# EAGLE board Main Board (EAGLE 9.6.2)
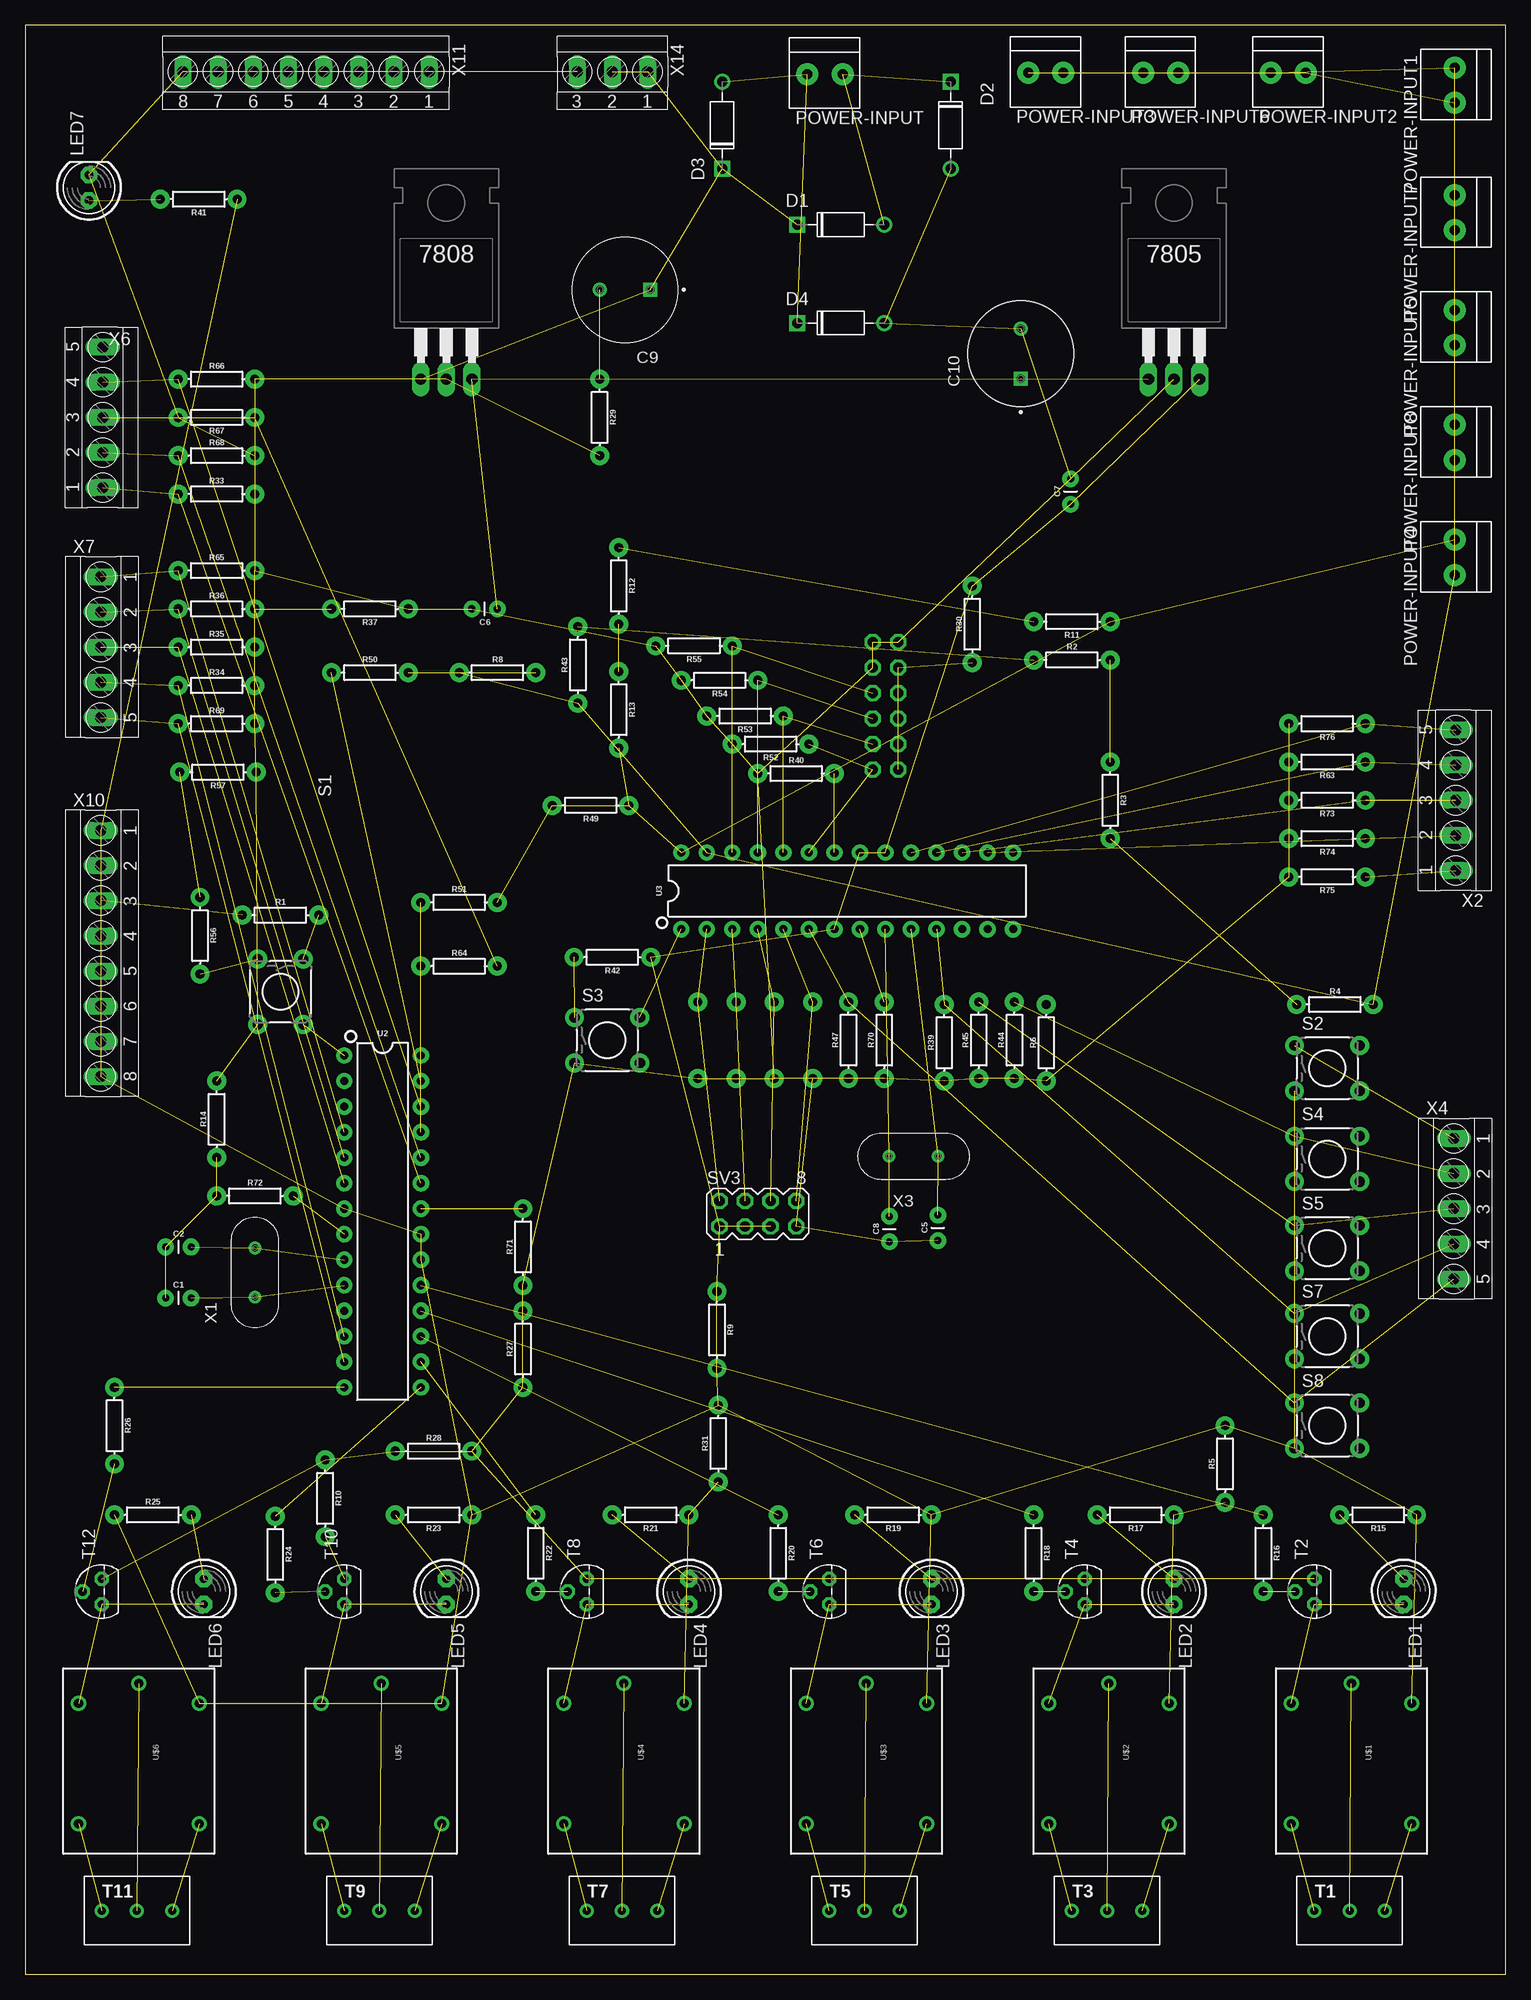
[diagram p0: board, top side]
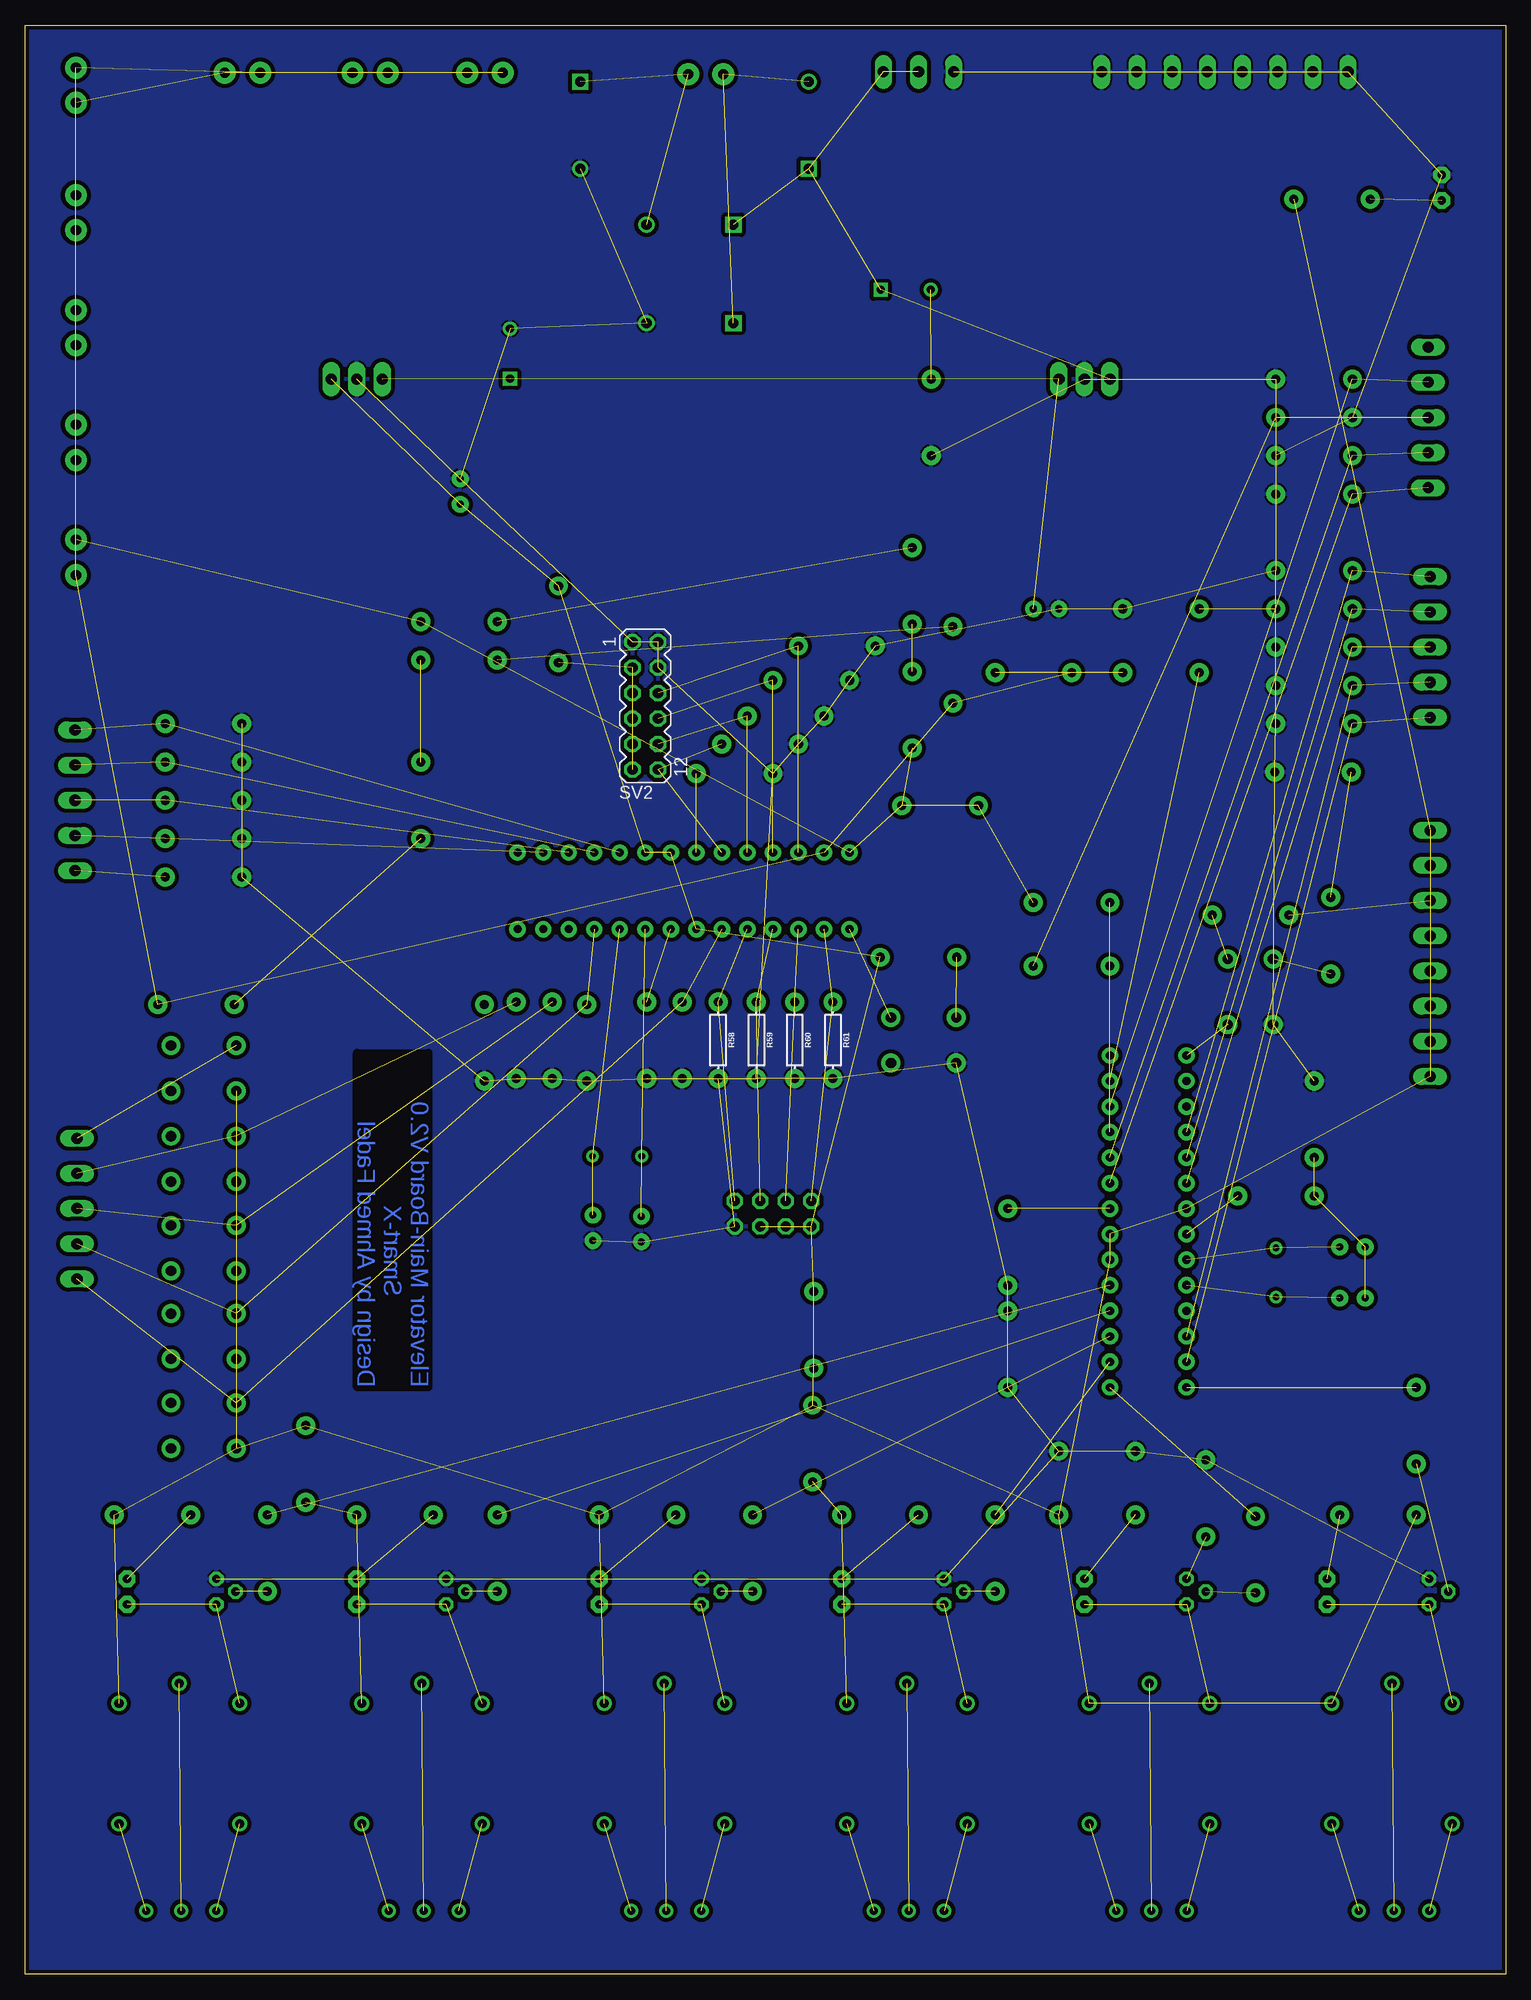
[diagram p1: board, bottom side, seen from below]

Size 147.3 x 193.98 mm. Coordinates in mm from the lower left corner, seen from the top.
Outline: 0,0 147.3,0 147.3,193.98 0,193.98 0,0
Copper layers 16: Bottom 0.105mm
Design rules "eC_1Layer_PClass3_BaseCopperO105 *": minimum track width 0.4mm, minimum drill 0.5mm, track to track 0.4mm, track to pad 0.4mm, pad to pad 0.4mm, via to via 0.4mm, smd to smd 0mil, copper to edge 0.4mm, drill to drill 0.35mm, minimum pad ring 0.3mm, minimum via ring 0.3mm, stop-mask expansion 0mil, vias tented up to drill 0.45mm, thermal gap 0.2mm

## Footprints (pad centres in the part's own frame; a part is rotated, then mirrored left to right if it is on the bottom)
TO220BH-NH = drill 1.118 long: 1 -2.54,-6.35; 2 0,-6.35; 3 2.54,-6.35
CAP-PTH-2.54 = drill 0.7 pad 1.651: 1 -1.27,0; 2 1.27,0
CAP_RADIAL_5MM = drill 0.8 pad 1.2 square: 1 -2.5,0 | drill 0.8 pad 1.2: 2 2.5,0
DO-41 = drill 1: A 4.325,0 | drill 1 square: C -4.325,0
LED5MM = drill 0.813 pad 1.676 octagon: A -1.27,0; K 1.27,0
1X2-3.5MM = drill 1 pad 2.184: 1 1.8,0; 2 -1.7,0
AXIAL-0.3 = drill 0.9 pad 1.88: P$1 -3.81,0; P$2 3.81,0
TACTILE-PTH = drill 1.016 pad 1.88: 1 -3.251,2.261; 2 3.251,2.261; 3 -3.251,-2.261; 4 3.251,-2.261
MA06-2 = drill 1.016 octagon: 1 -6.35,-1.27; 2 -6.35,1.27; 3 -3.81,-1.27; 4 -3.81,1.27; 5 -1.27,-1.27; 6 -1.27,1.27; 7 1.27,-1.27; 8 1.27,1.27; 9 3.81,-1.27; 10 3.81,1.27; 11 6.35,-1.27; 12 6.35,1.27
MA04-2 = drill 1.016 octagon: 1 -3.81,-1.27; 2 -3.81,1.27; 3 -1.27,-1.27; 4 -1.27,1.27; 5 1.27,-1.27; 6 1.27,1.27; 7 3.81,-1.27; 8 3.81,1.27
ED350V-03P = drill 0.8: P$1 0,0; P$2 3.5,0; P$3 7,0
TO92 = drill 0.813 octagon: 1 1.27,0; 2 0,1.905; 3 -1.27,0
DIP28 = drill 0.813 pad 1.626: 1 -16.51,-3.81; 2 -13.97,-3.81; 3 -11.43,-3.81; 4 -8.89,-3.81; 5 -6.35,-3.81; 6 -3.81,-3.81; 7 -1.27,-3.81; 8 1.27,-3.81; 9 3.81,-3.81; 10 6.35,-3.81; 11 8.89,-3.81; 12 11.43,-3.81; 13 13.97,-3.81; 14 16.51,-3.81; 15 16.51,3.81; 16 13.97,3.81; 17 11.43,3.81; 18 8.89,3.81; 19 6.35,3.81; 20 3.81,3.81; 21 1.27,3.81; 22 -1.27,3.81; 23 -3.81,3.81; 24 -6.35,3.81; 25 -8.89,3.81; 26 -11.43,3.81; 27 -13.97,3.81; 28 -16.51,3.81
SRD-05VDC-SL-C = drill 0.9: COIL0 -5.39,-6.12; COIL1 -5.39,5.88; SWCLOSED 6.61,-6.12; SWCOMMON -7.39,-0.12; SWOPEN 6.61,5.88
XTAL_HC49 = drill 0.65 pad 1.05: 1 -2.44,0; 2 2.44,0
TERMINAL-BLOCK-5-PIN-3.5MM-LONG-PAD = drill 1.1 pad 1.7 long: 1 -7,-0.1; 2 -3.5,-0.1; 3 0,-0.1; 4 3.5,-0.1; 5 7,-0.1
TERMINAL-BLOCK-8-PIN-3.5MM-LONG-PAD = drill 1.1 pad 1.7 long: 1 -12.25,-0.1; 2 -8.75,-0.1; 3 -5.25,-0.1; 4 -1.75,-0.1; 5 1.75,-0.1; 6 5.25,-0.1; 7 8.75,-0.1; 8 12.25,-0.1
TERMINAL-BLOCK-3-PIN-3.5MM-LONG-PAD = drill 1.1 pad 1.7 long: 1 -3.5,-0.1; 2 0,-0.1; 3 3.5,-0.1

## Placement (x,y rotation side)
7805  [TO220BH-NH]  114.3,165.1 0 top
7808  [TO220BH-NH]  41.91,165.1 0 top
C1  22pF  [CAP-PTH-2.54]  15.24,67.31 0 top
C2  22pF  [CAP-PTH-2.54]  15.24,72.39 0 top
C5  22pF  [CAP-PTH-2.54]  90.8,74.3 90 top
C6  104pF  [CAP-PTH-2.54]  45.72,135.89 180 top
C7  104pF  [CAP-PTH-2.54]  104.01,147.57 90 top
C8  22pF  [CAP-PTH-2.54]  85.98,74.17 90 top
C9  470 uF  [CAP_RADIAL_5MM]  59.69,167.64 180 top
C10  470 uF  [CAP_RADIAL_5MM]  99.06,161.29 90 top
D1  1N4001  [DO-41]  81.15,174.12 0 top
D2  1N4001  [DO-41]  92.08,184.02 270 top
D3  1N4001  [DO-41]  69.34,184.02 90 top
D4  1N4001  [DO-41]  81.15,164.34 0 top
LED1  [LED5MM]  137.16,38.1 270 top
LED2  [LED5MM]  114.3,38.1 270 top
LED3  [LED5MM]  90.17,38.1 270 top
LED4  [LED5MM]  66.04,38.1 270 top
LED5  [LED5MM]  41.91,38.1 270 top
LED6  [LED5MM]  17.78,38.1 270 top
LED7  [LED5MM]  6.35,177.8 90 top
POWER-INPUT  1X2-3.5MM  [1X2-3.5MM]  79.63,189.1 180 top
POWER-INPUT1  1X2-3.5MM  [1X2-3.5MM]  142.24,187.96 90 top
POWER-INPUT2  1X2-3.5MM  [1X2-3.5MM]  125.73,189.23 180 top
POWER-INPUT3  1X2-3.5MM  [1X2-3.5MM]  101.6,189.23 180 top
POWER-INPUT4  1X2-3.5MM  [1X2-3.5MM]  142.24,140.97 90 top
POWER-INPUT5  1X2-3.5MM  [1X2-3.5MM]  142.24,163.83 90 top
POWER-INPUT6  1X2-3.5MM  [1X2-3.5MM]  113.03,189.23 180 top
POWER-INPUT7  1X2-3.5MM  [1X2-3.5MM]  142.24,175.26 90 top
POWER-INPUT8  1X2-3.5MM  [1X2-3.5MM]  142.24,152.4 90 top
R1  10K  [AXIAL-0.3]  25.4,105.41 0 top
R2  0  [AXIAL-0.3]  104.14,130.81 0 top
R3  0  [AXIAL-0.3]  107.95,116.84 270 top
R4  0  [AXIAL-0.3]  130.3,96.52 0 top
R5  0  [AXIAL-0.3]  119.38,50.8 90 top
R6  10K  [AXIAL-0.3]  101.6,92.71 90 top
R8  0  [AXIAL-0.3]  46.99,129.54 0 top
R9  0  [AXIAL-0.3]  68.83,64.13 270 top
R10  0  [AXIAL-0.3]  29.84,47.37 270 top
R11  0  [AXIAL-0.3]  104.14,134.62 180 top
R12  0  [AXIAL-0.3]  59.05,138.18 270 top
R13  0  [AXIAL-0.3]  59.05,125.86 270 top
R14  0  [AXIAL-0.3]  19.05,85.09 90 top
R15  330  [AXIAL-0.3]  134.62,45.72 180 top
R16  1K  [AXIAL-0.3]  123.19,41.91 270 top
R17  330  [AXIAL-0.3]  110.49,45.72 180 top
R18  1K  [AXIAL-0.3]  100.33,41.91 270 top
R19  330  [AXIAL-0.3]  86.36,45.72 180 top
R20  1K  [AXIAL-0.3]  74.93,41.91 270 top
R21  330  [AXIAL-0.3]  62.23,45.72 180 top
R22  1K  [AXIAL-0.3]  50.8,41.91 270 top
R23  330  [AXIAL-0.3]  40.64,45.72 180 top
R24  1K  [AXIAL-0.3]  24.89,41.78 270 top
R25  330  [AXIAL-0.3]  12.7,45.72 0 top
R26  1K  [AXIAL-0.3]  8.89,54.61 270 top
R27  0  [AXIAL-0.3]  49.53,62.23 90 top
R28  0  [AXIAL-0.3]  40.64,52.07 0 top
R29  0  [AXIAL-0.3]  57.15,154.94 270 top
R30  0  [AXIAL-0.3]  94.23,134.37 90 top
R31  0  [AXIAL-0.3]  68.96,52.83 90 top
R33  10K  [AXIAL-0.3]  19.05,147.32 0 top
R34  10K  [AXIAL-0.3]  19.05,128.27 0 top
R35  10K  [AXIAL-0.3]  19.05,132.08 0 top
R36  10K  [AXIAL-0.3]  19.05,135.89 0 top
R37  0  [AXIAL-0.3]  34.29,135.89 180 top
R39  10K  [AXIAL-0.3]  91.44,92.71 90 top
R40  0  [AXIAL-0.3]  76.71,119.51 0 top
R41  330  [AXIAL-0.3]  17.27,176.66 180 top
R42  10K  [AXIAL-0.3]  58.42,101.22 180 top
R43  0  [AXIAL-0.3]  54.99,130.3 90 top
R44  10K  [AXIAL-0.3]  98.42,92.96 90 top
R45  10K  [AXIAL-0.3]  94.87,92.96 90 top
R47  10K  [AXIAL-0.3]  81.91,92.96 90 top
R49  0  [AXIAL-0.3]  56.26,116.33 180 top
R50  0  [AXIAL-0.3]  34.29,129.54 0 top
R51  0  [AXIAL-0.3]  43.18,106.68 0 top
R52  10K  [AXIAL-0.3]  74.17,122.43 180 top
R53  10K  [AXIAL-0.3]  71.63,125.22 180 top
R54  10K  [AXIAL-0.3]  69.09,128.78 180 top
R55  10K  [AXIAL-0.3]  66.55,132.21 180 top
R56  0  [AXIAL-0.3]  17.4,103.38 270 top
R57  0  [AXIAL-0.3]  19.18,119.63 180 top
R58  10K  [AXIAL-0.3]  78.36,92.96 270 bottom
R59  10K  [AXIAL-0.3]  74.55,92.96 270 bottom
R60  10K  [AXIAL-0.3]  70.74,92.96 270 bottom
R61  10K  [AXIAL-0.3]  66.93,92.96 270 bottom
R63  10K  [AXIAL-0.3]  129.54,120.65 180 top
R64  0  [AXIAL-0.3]  43.18,100.33 0 top
R65  10K  [AXIAL-0.3]  19.05,139.7 0 top
R66  10K  [AXIAL-0.3]  19.05,158.75 0 top
R67  10K  [AXIAL-0.3]  19.05,154.94 180 top
R68  10K  [AXIAL-0.3]  19.05,151.13 0 top
R69  10K  [AXIAL-0.3]  19.05,124.46 0 top
R70  0  [AXIAL-0.3]  85.47,92.96 90 top
R71  0  [AXIAL-0.3]  49.53,72.39 90 top
R72  0  [AXIAL-0.3]  22.86,77.47 0 top
R73  10K  [AXIAL-0.3]  129.54,116.84 180 top
R74  10K  [AXIAL-0.3]  129.54,113.03 180 top
R75  10K  [AXIAL-0.3]  129.54,109.22 180 top
R76  10K  [AXIAL-0.3]  129.54,124.46 180 top
S1  [TACTILE-PTH]  25.4,97.79 270 top
S2  [TACTILE-PTH]  129.54,90.17 0 top
S3  [TACTILE-PTH]  57.91,92.96 0 top
S4  [TACTILE-PTH]  129.54,81.15 0 top
S5  [TACTILE-PTH]  129.54,72.26 0 top
S7  [TACTILE-PTH]  129.54,63.5 0 top
S8  [TACTILE-PTH]  129.54,54.61 0 top
SV2  [MA06-2]  85.6,126.24 270 bottom
SV3  [MA04-2]  72.9,75.69 0 top
T1  ST03-3.5MM  [ED350V-03P]  128.27,6.35 0 top
T2  BC547  [TO92]  128.27,38.1 90 top
T3  ST03-3.5MM  [ED350V-03P]  104.14,6.35 0 top
T4  BC547  [TO92]  105.41,38.1 90 top
T5  ST03-3.5MM  [ED350V-03P]  80.01,6.35 0 top
T6  BC547  [TO92]  80.01,38.1 90 top
T7  ST03-3.5MM  [ED350V-03P]  55.88,6.35 0 top
T8  BC547  [TO92]  55.88,38.1 90 top
T9  ST03-3.5MM  [ED350V-03P]  31.75,6.35 0 top
T10  BC547  [TO92]  31.75,38.1 90 top
T11  ST03-3.5MM  [ED350V-03P]  7.62,6.35 0 top
T12  BC547  [TO92]  7.62,38.1 90 top
U2  328P  [DIP28]  35.56,74.93 270 top
U3  328P  [DIP28]  81.79,107.82 0 top
U$1  RELAYPTH  [SRD-05VDC-SL-C]  132.08,21.59 270 top
U$2  RELAYPTH  [SRD-05VDC-SL-C]  107.95,21.59 270 top
U$3  RELAYPTH  [SRD-05VDC-SL-C]  83.82,21.59 270 top
U$4  RELAYPTH  [SRD-05VDC-SL-C]  59.69,21.59 270 top
U$5  RELAYPTH  [SRD-05VDC-SL-C]  35.56,21.59 270 top
U$6  RELAYPTH  [SRD-05VDC-SL-C]  11.43,21.59 270 top
X1  49S/18PF  [XTAL_HC49]  22.86,69.85 90 top
X2  TERMINAL-BLOCK-3.5MM-5-PIN-LONG-PAD  [TERMINAL-BLOCK-5-PIN-3.5MM-LONG-PAD]  142.24,116.84 90 top
X3  49S/18PF  [XTAL_HC49]  88.39,81.41 180 top
X4  TERMINAL-BLOCK-3.5MM-5-PIN-LONG-PAD  [TERMINAL-BLOCK-5-PIN-3.5MM-LONG-PAD]  142.24,76.2 270 top
X6  TERMINAL-BLOCK-3.5MM-5-PIN-LONG-PAD  [TERMINAL-BLOCK-5-PIN-3.5MM-LONG-PAD]  7.62,154.94 90 top
X7  TERMINAL-BLOCK-3.5MM-5-PIN-LONG-PAD  [TERMINAL-BLOCK-5-PIN-3.5MM-LONG-PAD]  7.62,132.08 270 top
X10  TERMINAL-BLOCK-3.5MM-8-PIN-LONG-PAD  [TERMINAL-BLOCK-8-PIN-3.5MM-LONG-PAD]  7.62,101.6 270 top
X11  TERMINAL-BLOCK-3.5MM-8-PIN-LONG-PAD  [TERMINAL-BLOCK-8-PIN-3.5MM-LONG-PAD]  27.94,189.23 180 top
X14  TERMINAL-BLOCK-3.5MM-3-PIN-LONG-PAD  [TERMINAL-BLOCK-3-PIN-3.5MM-LONG-PAD]  58.42,189.23 180 top

## Library data of the parts
7805 7808 = bt_regulator
C1 C2 C5-C8 = SparkFun-Capacitors; PROD_ID: CAP-09128
C9 C10 = Resistor_Capacitor; CREATED_BY: PCBLayout.com; DIGIKEY_PART_NUMBER: P5156-ND; MANUFACTURER: Panasonic Electronic Components; MPN: ECA-1EM102; PACKAGE: CAP RADIAL 5MM LS
D1-D4 = Diodes; CREATED_BY: PCBLayout.com; DIGIKEY_PART_NUMBER: 1N4004MSCT-ND; MANUFACTURER: Micro Commercial Co; MPN: 1N4004; PACKAGE: DO-41
LED1-LED7 POWER-INPUT POWER-INPUT1-POWER-INPUT8 = adafruit
R1-R6 R8-R31 R33-R37 R39-R45 R47 R49-R61 R63-R76 = SparkFun-Resistors; PROD_ID: RES-09327
S1-S5 S7 S8 = SparkFun
SV2 SV3 = con-lstb; OC_FARNELL: unknown; OC_NEWARK: unknown
T1 T3 T5 T7 T9 T11 = con-dinkle
T2 T4 T6 T8 T10 T12 = transistor
U2 U3 = SparkFun-IC-Microcontroller; PROD_ID: IC-09136
U$1-U$6 = SRD-05VDC-SL-C
X1 X3 = Crystals_Oscillators; CREATED_BY: PCBLayout.com; MANUFACTURER: Xinhunjing; MPN: 49S/18PF; PACKAGE: SMD
X2 X4 X6 X7 X10 X11 X14 = Rembrandt Electronics - Terminal Block 3-5mm v1-0

## Nets
A1-0: R33.P$1 U2.23 X6.1
A1-1: R68.P$1 U2.24 X6.2
A1-2: R64.P$2 R67.P$1 X6.3
A1-3: R66.P$1 U2.26 X6.4
A3-0: R52.P$1 SV2.12 U3.23
A3-1: R53.P$1 SV2.10 U3.24
A3-2: R54.P$1 SV2.8 U3.25
A3-3: R55.P$1 SV2.6 U3.26
A4: POWER-INPUT1.2 POWER-INPUT2.2 POWER-INPUT3.2 POWER-INPUT4.2 POWER-INPUT5.2 POWER-INPUT6.2 POWER-INPUT7.2 POWER-INPUT8.2 R4.P$2 R8.P$1 R43.P$1 U3.27
A5: POWER-INPUT1.1 POWER-INPUT2.1 POWER-INPUT3.1 POWER-INPUT4.1 POWER-INPUT5.1 POWER-INPUT6.1 POWER-INPUT7.1 POWER-INPUT8.1 R11.P$1 R13.P$2 R49.P$1 R49.P$2 R51.P$2 U3.28
D1-2: R65.P$1 U2.4 X7.1
D1-3: R36.P$1 U2.5 X7.2
D1-4: R35.P$1 U2.6 X7.3
D1-6: R34.P$1 U2.12 X7.4
D1-7: R69.P$1 U2.13 X7.5
D1-8: R26.P$1 U2.14
D1-9: R24.P$1 U2.15
D1-10: R22.P$1 U2.16
D1-11: R20.P$1 U2.17
D1-12: R18.P$1 U2.18
D1-13: R16.P$1 U2.19
D3-0: R61.P$1 SV3.2 U3.2
D3-1: R60.P$1 SV3.4 U3.3
D3-2: R59.P$1 SV3.6 U3.4
D3-3: R58.P$1 SV3.8 U3.5
D3-4: R47.P$2 S8.1 U3.6 X4.5
D3-5: R39.P$2 S7.1 U3.11 X4.4
D3-7: U3.13
D3-8: U3.14
D3-9: R75.P$1 X2.1
D3-10: R74.P$1 U3.16 X2.2
D3-11: R73.P$1 U3.17 X2.3
D3-12: R63.P$1 U3.18 X2.4
D3-13: R76.P$1 U3.19 X2.5
GND: 7805.2 7808.2 C5.1 C6.2 C7.2 C8.1 C10.2 D2.A D4.A LED7.K R6.P$1 R10.P$1 R14.P$2 R27.P$1 R27.P$2 R28.P$1 R28.P$2 R29.P$2 R33.P$2 R34.P$2 R35.P$2 R37.P$1 R39.P$1 R40.P$1 R44.P$1 R45.P$1 R47.P$1 R52.P$2 R53.P$2 R54.P$2 R55.P$2 R57.P$1 R58.P$2 R59.P$2 R60.P$2 R61.P$2 R63.P$2 R65.P$2 R66.P$2 R67.P$2 R68.P$2 R69.P$2 R70.P$1 R71.P$1 R73.P$2 R74.P$2 R75.P$2 R76.P$2 S1.4 S3.3 SV2.1 SV2.2 SV2.4 SV3.7 T2.1 T4.1 T6.1 T8.1 T12.1 X11.1 X11.2 X11.3 X11.4 X11.5 X11.6 X11.7 X11.8 X14.3
N$1: C2.2 U2.9 X1.2
N$2: C1.2 U2.10 X1.1
N$3: R1.P$2 S1.1
N$4: S1.2 U2.1
N$5: R2.P$1 R43.P$2
N$6: R2.P$2 R3.P$1
N$7: R3.P$2 R4.P$1
N$8: R5.P$1 R17.P$1 U$2.COIL1
N$9: LED1.A R15.P$2
N$10: LED1.K T2.3 U$1.COIL0
N$11: R16.P$2 T2.2
N$12: T1.P$2 U$1.SWCOMMON
N$13: T1.P$1 U$1.SWCLOSED
N$14: T1.P$3 U$1.SWOPEN
N$15: LED2.A R17.P$2
N$16: LED2.K T4.3 U$2.COIL0
N$17: R18.P$2 T4.2
N$18: T3.P$2 U$2.SWCOMMON
N$19: T3.P$1 U$2.SWCLOSED
N$20: T3.P$3 U$2.SWOPEN
N$21: LED3.A R19.P$2
N$22: LED3.K T6.3 U$3.COIL0
N$23: R20.P$2 T6.2
N$24: T5.P$2 U$3.SWCOMMON
N$25: T5.P$1 U$3.SWCLOSED
N$26: T5.P$3 U$3.SWOPEN
N$27: LED4.A R21.P$2
N$28: LED4.K T8.3 U$4.COIL0
N$29: R22.P$2 T8.2
N$30: T7.P$2 U$4.SWCOMMON
N$31: T7.P$1 U$4.SWCLOSED
N$32: T7.P$3 U$4.SWOPEN
N$33: LED5.A R23.P$2
N$34: LED5.K T10.3 U$5.COIL0
N$35: R24.P$2 T10.2
N$36: T9.P$2 U$5.SWCOMMON
N$37: T9.P$1 U$5.SWCLOSED
N$38: T9.P$3 U$5.SWOPEN
N$39: LED6.A R25.P$2
N$40: LED6.K T12.3 U$6.COIL0
N$41: R26.P$2 T12.2
N$42: T11.P$2 U$6.SWCOMMON
N$43: T11.P$1 U$6.SWCLOSED
N$44: T11.P$3 U$6.SWOPEN
N$45: 7808.1 C9.1 D1.C D3.C X14.1 X14.2
N$46: LED7.A R41.P$2
N$47: D3.A D4.C POWER-INPUT.1
N$48: D1.A D2.C POWER-INPUT.2
N$49: C8.2 U3.9 X3.2
N$50: 7805.1 7808.3 C6.1 C10.1
N$51: C5.2 U3.10 X3.1
N$52: R42.P$2 S3.1
N$53: S3.2 U3.1
N$54: C9.2 R29.P$1
N$55: C1.1 C2.1 R14.P$1 R72.P$1
N$56: R11.P$2 R12.P$1
N$57: R50.P$1 U2.27
N$58: R51.P$1 U2.28
N$60: R6.P$2
N$61: R64.P$1 U2.25
N$62: R10.P$2 T10.1
N$63: R12.P$2 R13.P$1
N$65: R45.P$2 S5.1 X4.3
N$66: R44.P$2 S4.1 X4.2
N$67: R40.P$2 U3.22
N$68: R70.P$2 U3.8
N$69: R71.P$2 U2.22
N$70: R72.P$2 U2.8
N$72: R8.P$2 R50.P$2
N$73: R30.P$1 SV2.3 SV2.5 SV2.7 SV2.9 SV2.11
N$74: R21.P$1 R31.P$1 U$4.COIL1
N$75: R36.P$2 R37.P$2
N$76: R56.P$2 S1.3
N$77: R56.P$1 R57.P$2
S$1: S2.1 X4.1
S$2: U3.15
VCC: 7805.3 C7.1 R1.P$1 R5.P$2 R9.P$1 R9.P$2 R15.P$1 R19.P$1 R23.P$1 R25.P$1 R30.P$2 R31.P$2 R41.P$1 R42.P$1 S2.3 S4.3 S5.3 S7.3 S8.3 SV3.1 SV3.3 SV3.5 U2.7 U2.20 U2.21 U3.7 U3.20 U3.21 U$1.COIL1 U$3.COIL1 U$5.COIL1 U$6.COIL1 X10.1 X10.2 X10.3 X10.4 X10.5 X10.6 X10.7 X10.8

## Tracks (layer width: path | path; a pad name or v marks a point on that pad's centre or on a via)
A1-0  (2 unrouted)
A1-1  (2 unrouted)
A1-2  (2 unrouted)
A1-3  (2 unrouted)
A3-0  (2 unrouted)
A3-1  (2 unrouted)
A3-2  (2 unrouted)
A3-3  (2 unrouted)
A4  (11 unrouted)
A5  (13 unrouted)
D1-2  (2 unrouted)
D1-3  (2 unrouted)
D1-4  (2 unrouted)
D1-6  (2 unrouted)
D1-7  (2 unrouted)
D1-8  (1 unrouted)
D1-9  (1 unrouted)
D1-10  (1 unrouted)
D1-11  (1 unrouted)
D1-12  (1 unrouted)
D1-13  (1 unrouted)
D3-0  (2 unrouted)
D3-1  (2 unrouted)
D3-2  (2 unrouted)
D3-3  (2 unrouted)
D3-4  (3 unrouted)
D3-5  (3 unrouted)
D3-9  (1 unrouted)
D3-10  (2 unrouted)
D3-11  (2 unrouted)
D3-12  (2 unrouted)
D3-13  (2 unrouted)
GND  (67 unrouted)
  pour Bottom: 0,194.31 147.32,194.31 147.32,0 0,0
N$1  (2 unrouted)
N$2  (2 unrouted)
N$3  (1 unrouted)
N$4  (1 unrouted)
N$5  (1 unrouted)
N$6  (1 unrouted)
N$7  (1 unrouted)
N$8  (2 unrouted)
N$9  (1 unrouted)
N$10  (2 unrouted)
N$11  (1 unrouted)
N$12  (1 unrouted)
N$13  (1 unrouted)
N$14  (1 unrouted)
N$15  (1 unrouted)
N$16  (2 unrouted)
N$17  (1 unrouted)
N$18  (1 unrouted)
N$19  (1 unrouted)
N$20  (1 unrouted)
N$21  (1 unrouted)
N$22  (2 unrouted)
N$23  (1 unrouted)
N$24  (1 unrouted)
N$25  (1 unrouted)
N$26  (1 unrouted)
N$27  (1 unrouted)
N$28  (2 unrouted)
N$29  (1 unrouted)
N$30  (1 unrouted)
N$31  (1 unrouted)
N$32  (1 unrouted)
N$33  (1 unrouted)
N$34  (2 unrouted)
N$35  (1 unrouted)
N$36  (1 unrouted)
N$37  (1 unrouted)
N$38  (1 unrouted)
N$39  (1 unrouted)
N$40  (2 unrouted)
N$41  (1 unrouted)
N$42  (1 unrouted)
N$43  (1 unrouted)
N$44  (1 unrouted)
N$45  (5 unrouted)
N$46  (1 unrouted)
N$47  (2 unrouted)
N$48  (2 unrouted)
N$49  (2 unrouted)
N$50  (3 unrouted)
N$51  (2 unrouted)
N$52  (1 unrouted)
N$53  (1 unrouted)
N$54  (1 unrouted)
N$55  (3 unrouted)
N$56  (1 unrouted)
N$57  (1 unrouted)
N$58  (1 unrouted)
N$61  (1 unrouted)
N$62  (1 unrouted)
N$63  (1 unrouted)
N$65  (2 unrouted)
N$66  (2 unrouted)
N$67  (1 unrouted)
N$68  (1 unrouted)
N$69  (1 unrouted)
N$70  (1 unrouted)
N$72  (1 unrouted)
N$73  (5 unrouted)
N$74  (2 unrouted)
N$75  (1 unrouted)
N$76  (1 unrouted)
N$77  (1 unrouted)
S$1  (1 unrouted)
VCC  (39 unrouted)

## Text on the board
Bottom: Elevator Main-Board V2.0 / Smart-X / Design by Ahmed Fadel